# Altium PCB smart-watch.PcbDoc (part 2 of 2)
Units mm, origin at the board's own origin, x right, y up, seen from the top; angles counter-clockwise.
Board outline 30.1 x 34.67 mm, 2 copper layers (Top Layer, Bottom Layer); 78 components, 120 nets, 977 pads, 0 vias.
Unrouted connection lines stored in the file: 551.
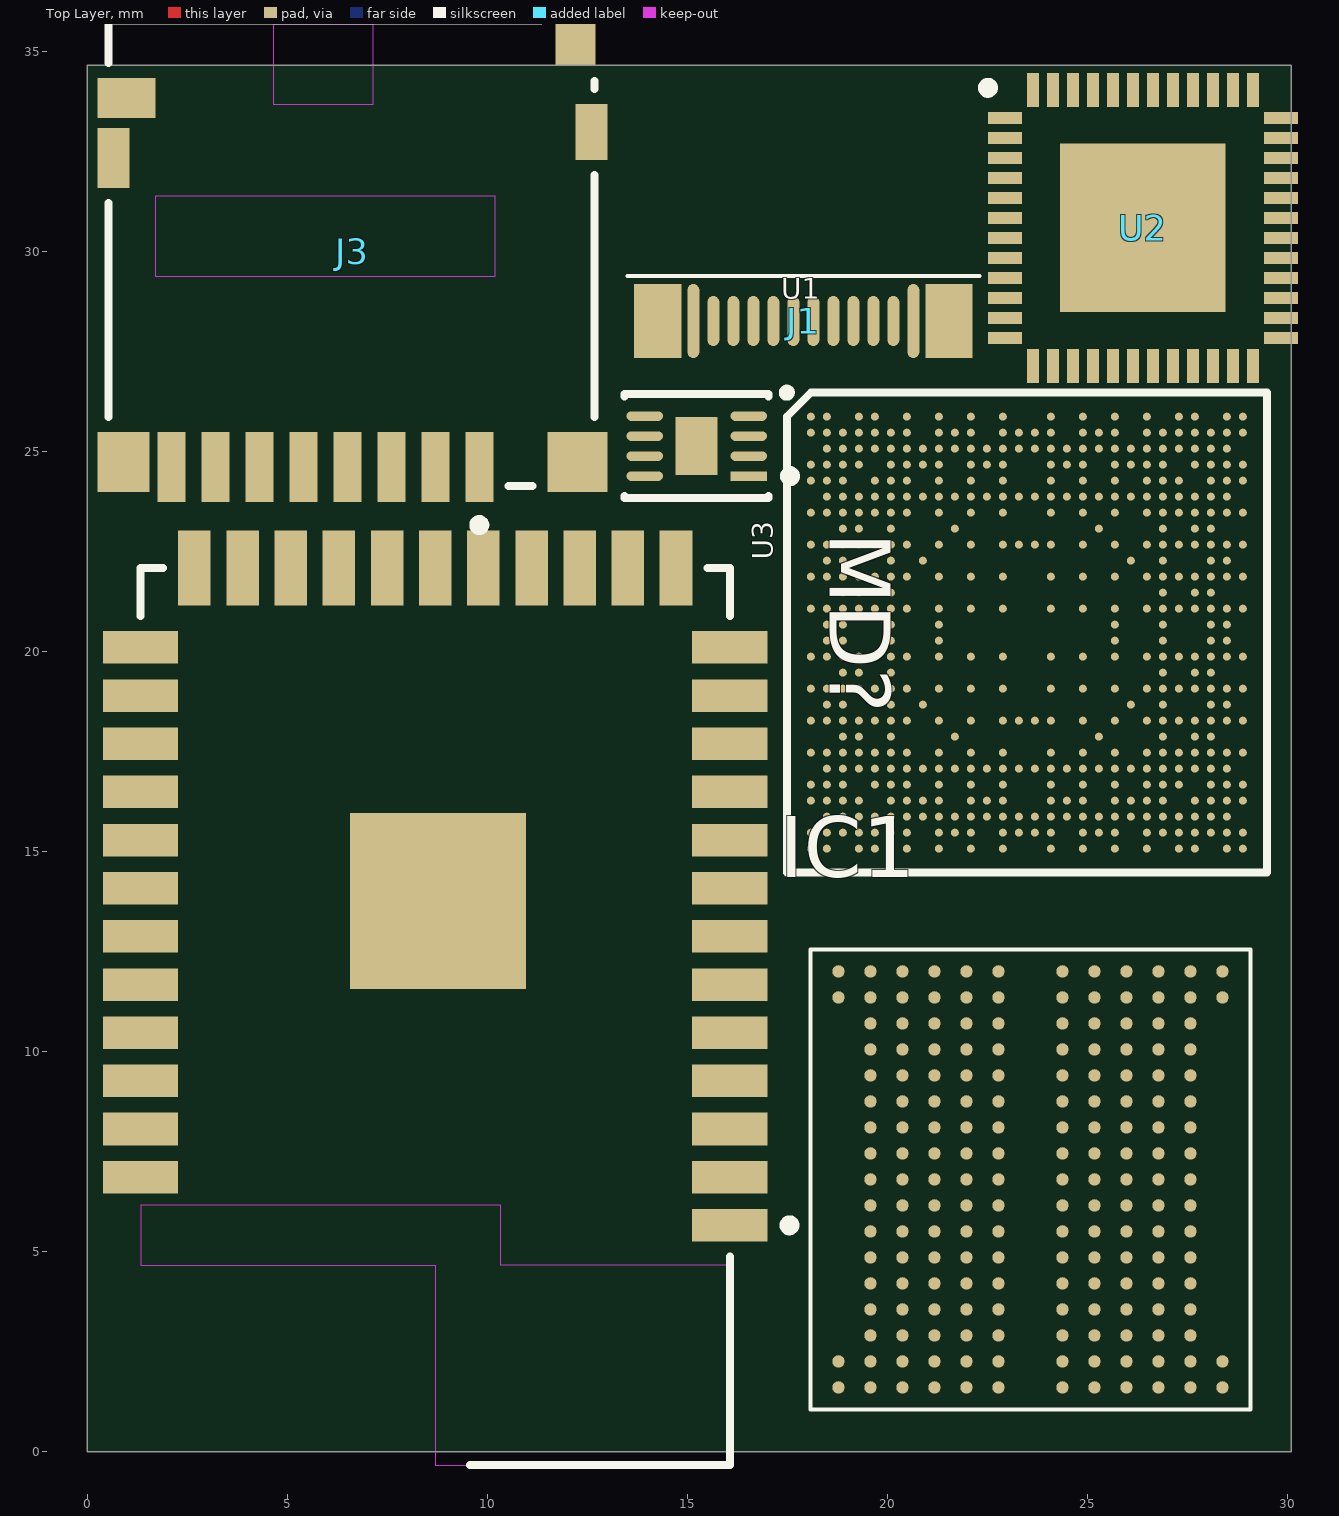
[diagram p0: Top Layer view]

## Nets (pads, with @x,y where several pads share a name; then routed paths per layer and width w, separated by ;. In a path a pad name is that pad's centre, name@x,y a point inside that pad or via, vN(x,y) a via of type N, cw(c..) or ccw(c..) an arc to the next point about the centre after c; other vN are vias at no path point) (continued)
SD1_DATA3: J3.2 U1.B1
SPI1_CLK: J2.18 U1.K2
SPI1_CS: J2.16 U1.N3
SPI1_DCX: J2.20 U1.V4
SPI1_MISO: J2.24 U1.M3
SPI1_MOSI: J2.22 U1.L3
SW1_1V1: C24.1 C25.1 C33.2 C34.1 C35.2 C36.1 L3.1 U1.A20 U1.B20 U1.C16 U1.C17 U1.C18 U1.C19 U1.C20 U1.C21 U1.C22 U1.F19 U1.H10 U1.H19 U1.J9 U1.J20 U1.K3 U1.K6 U1.K8 U1.K21 U1.K23 U1.K26 U1.L1 U1.L2 U1.L11 U1.L18 U1.L27 U1.L28 U1.N13 U1.N16 U1.P3 U1.P6 U1.P23 U1.P26 U1.R3 U1.R6 U1.R23 U1.R26 U1.T13 U1.T16 U1.V11 U1.V18 U2.6
TP_I2C_SCL: J2.7 R8.1 U1.N6
TP_I2C_SDA: J2.5 R7.1 U1.N7
TP_INT: J2.13 U1.Y7
TP_RST_B: J2.11 U1.Y6
VBAT: C1.1 C2.1 C32.2 D1.2 P1.2 U2.42 U3.8
VCI_EN: J2.1 U1.V5
VDD_1P2_CAP: C43.2 U1.AA10
VDDA_1P0_CAP: C42.2 U1.AH4
VDDA_PHY_1P8: C41.2 U1.J15 U1.Y14
VDDD_1P0_CAP: C40.2 U1.AC13 U1.AE12 U1.AF12 U1.J16
VLDO1_1V8: C14.2 U1.AG5 U2.14
VLDO2_1V5: C15.2 U2.15
VLDO4_3V3: C17.2 U2.22
VSNVS: C4.1 C39.2 R1.1 U1.Y13 U2.34
pads on no net: IC1.B4 IC1.C4 IC1.K4 IC1.K9 IC1.L4 IC1.R3 J1.A2 J1.A3 J1.A6 J1.A7 J1.A8 J1.A10 J1.A11 J1.B2 J1.B3 J1.B6 J1.B7 J1.B8 J1.B10 J1.B11 J2.9 J2.28 J2.29 J2.30 MD?.1 MD?.2 MD?.3 MD?.4 MD?.5 MD?.6 MD?.7 MD?.8 MD?.9 MD?.10 MD?.11 MD?.12 MD?.13 MD?.14 MD?.15 MD?.16 MD?.17 MD?.18 MD?.19 MD?.20 MD?.21 MD?.22 MD?.23 MD?.24 MD?.25 MD?.26 MD?.27 MD?.28 MD?.29 MD?.30 MD?.31 MD?.32 MD?.33 MD?.34 MD?.35 MD?.36 MD?.37 U1.A7 U1.A9 U1.A11 U1.A13 U1.A16 U1.A18 U1.A22 U1.A27 U1.AA3 U1.AB1 U1.AB2 U1.AB5 U1.AB6 U1.AB7 U1.AB9 U1.AB11 U1.AB13 U1.AB22 U1.AB23 U1.AC2 U1.AC3 U1.AC4 U1.AC5 U1.AC6 U1.AC7 U1.AC9 U1.AC11 U1.AC23 U1.AD1 U1.AD2 U1.AD7 U1.AD9 U1.AD11 U1.AD13 U1.AD23 U1.AE1 U1.AE2 U1.AE3 U1.AE4 U1.AE11 U1.AE20 U1.AE27 U1.AE28 U1.AF2 U1.AF6 U1.AF7 U1.AF27 U1.AG1 U1.AG2 U1.AG3 U1.AG4 U1.AG6 U1.AG7 U1.AG9 U1.AG11 U1.AG13 U1.AG14 U1.AG15 U1.AG16 U1.AG18 U1.AG25 U1.AG26 U1.AG27 U1.AG28 U1.AH2 U1.AH5 U1.AH7 U1.AH9 U1.AH11 U1.AH13 U1.AH16 U1.AH18 U1.AH25 U1.AH27 U1.B6 U1.B7 U1.B9 U1.B10 U1.B11 U1.B13 U1.B14 U1.B15 U1.B16 U1.B18 U1.B22 U1.B27 U1.B28 U1.C2 U1.C4 U1.C6 U1.C8 U1.C9 U1.C11 U1.C12 U1.C27 U1.D1 U1.D2 U1.D3 U1.D4 U1.D6 U1.D7 U1.D9 U1.D11 U1.D13 U1.D16 U1.D18 U1.D20 U1.D23 U1.D25 U1.D26 U1.D27 U1.D28 U1.E1 U1.E2 U1.E6 U1.E7 U1.E9 U1.E11 U1.E13 U1.E16 U1.E18 U1.E20 U1.E22 U1.E23 U1.E27 U1.E28 U1.F2 U1.F3 U1.F4 U1.F5 U1.F6 U1.F7 U1.F9 U1.F11 U1.F13 U1.F16 U1.F18 U1.F20 U1.F22 U1.F23 U1.F24 U1.F25 U1.F26 U1.G1 U1.G2 U1.G3 U1.G4 U1.G5 U1.G6 U1.G7 U1.G9 U1.G11 U1.G13 U1.G16 U1.G18 U1.G20 U1.G22 U1.G23 U1.G24 U1.G25 U1.G26 U1.G27 U1.G28 U1.H3 U1.H26 U1.J1 U1.J2 U1.J3 U1.J4 U1.J5 U1.J6 U1.J7 U1.J13 U1.J14 U1.J18 U1.J22 U1.J23 U1.J24 U1.J25 U1.J26 U1.J27 U1.J28 U1.K27 U1.L4 U1.L5 U1.L6 U1.L7 U1.L9 U1.L20 U1.L22 U1.L23 U1.L24 U1.L25 U1.L26 U1.M26 U1.N1 U1.N2 U1.N9 U1.N20 U1.N22 U1.N23 U1.N24 U1.N25 U1.N26 U1.N27 U1.N28 U1.P2 U1.P20 U1.P27 U1.R2 U1.R20 U1.R27 U1.T1 U1.T2 U1.T3 U1.T4 U1.T5 U1.T6 U1.T7 U1.T9 U1.T26 U1.T27 U1.T28 U1.U3 U1.V1 U1.V2 U1.V3 U1.V6 U1.V7 U1.V9 U1.V26 U1.W2 U1.Y15 U1.Y16 U1.Y18 U2.11 U2.23 U2.25 U2.30 U2.35 U2.37 U3.2 U3.3 U3.6